# Altium PCB PCB1.PcbDoc
Units mil, origin at the board's own origin, x right, y up, seen from the top; angles counter-clockwise.
Board outline 1615 x 1995 mil, 4 copper layers (Top Layer, Layer 1, Layer 2, Bottom Layer), stack 23.756 mil thick; 24 components, 18 nets, 92 pads, 0 vias.
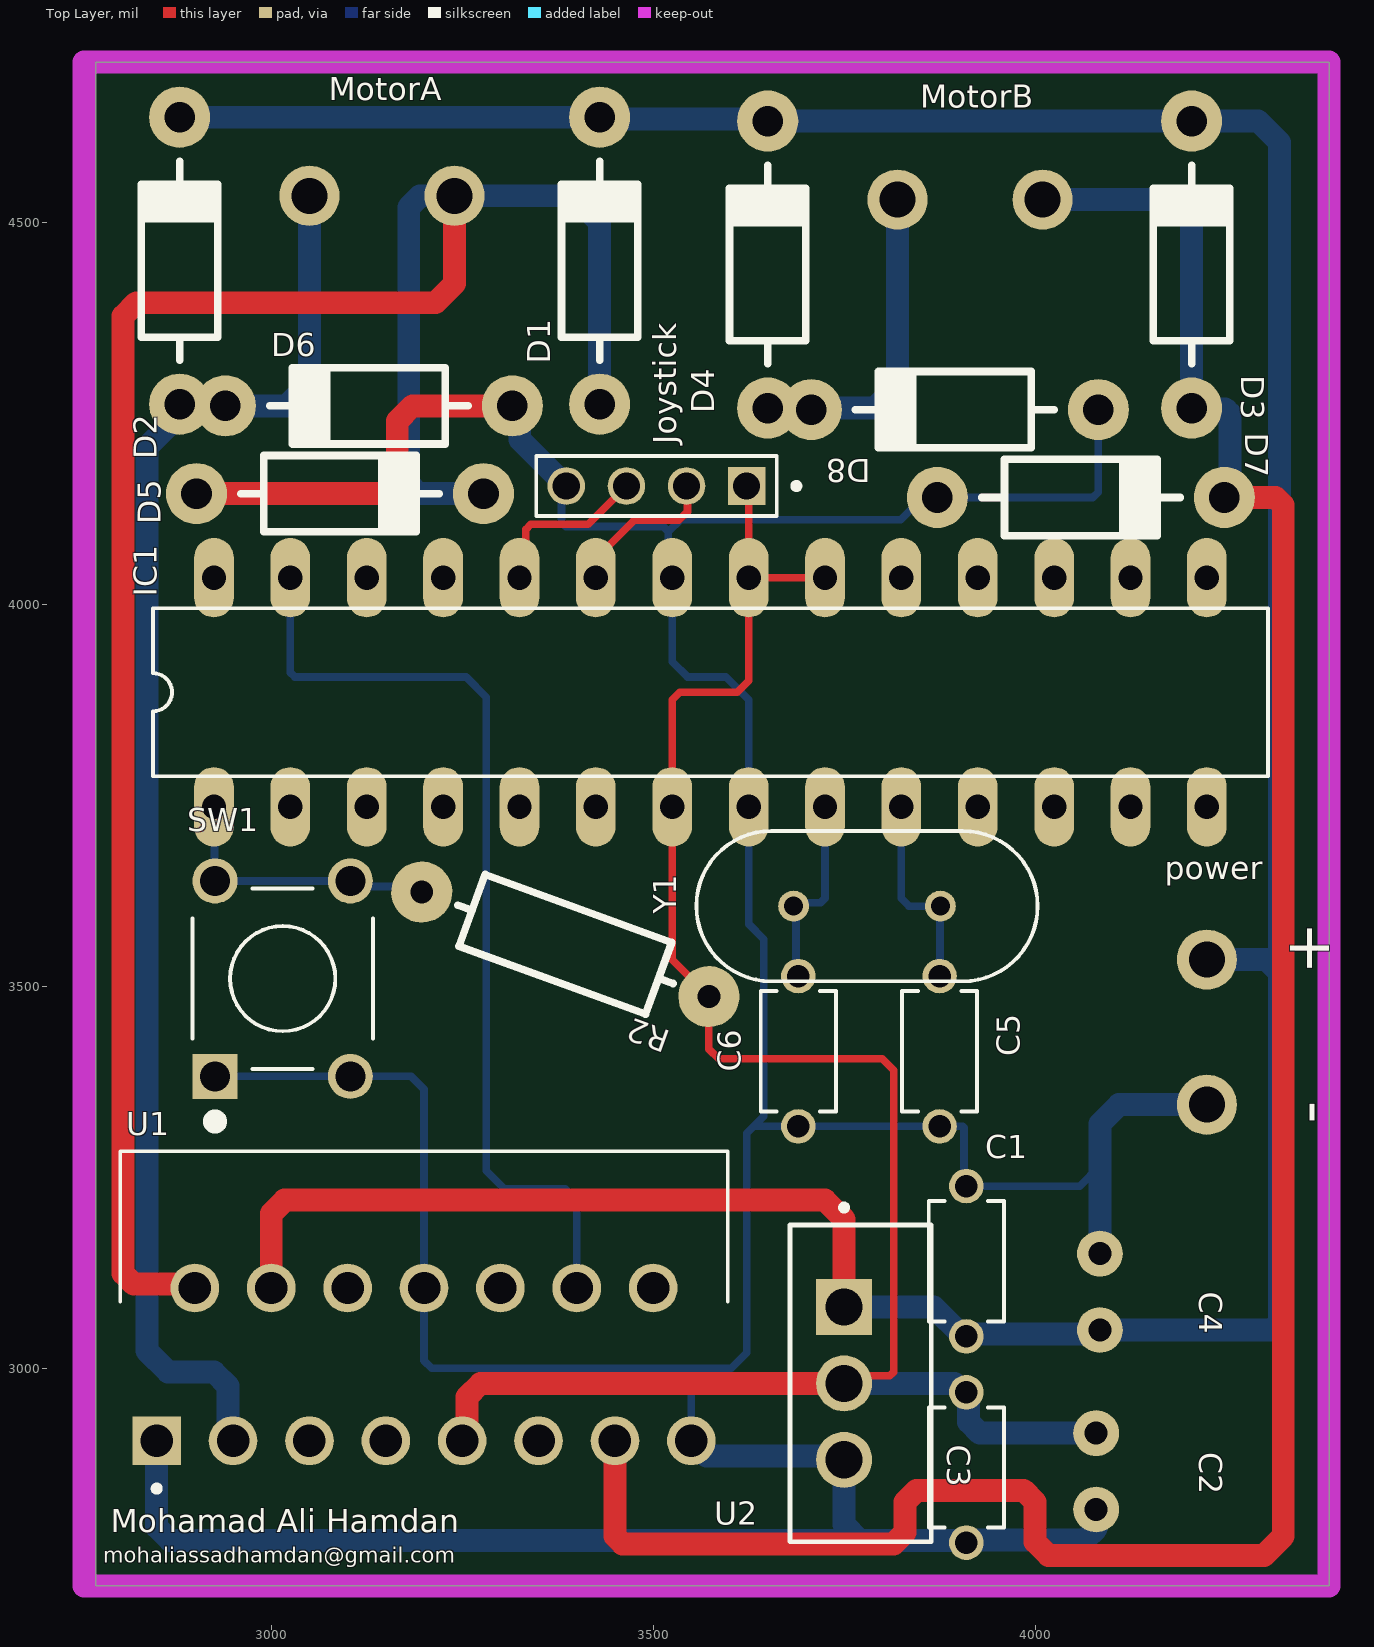
[diagram p0: Top Layer view]
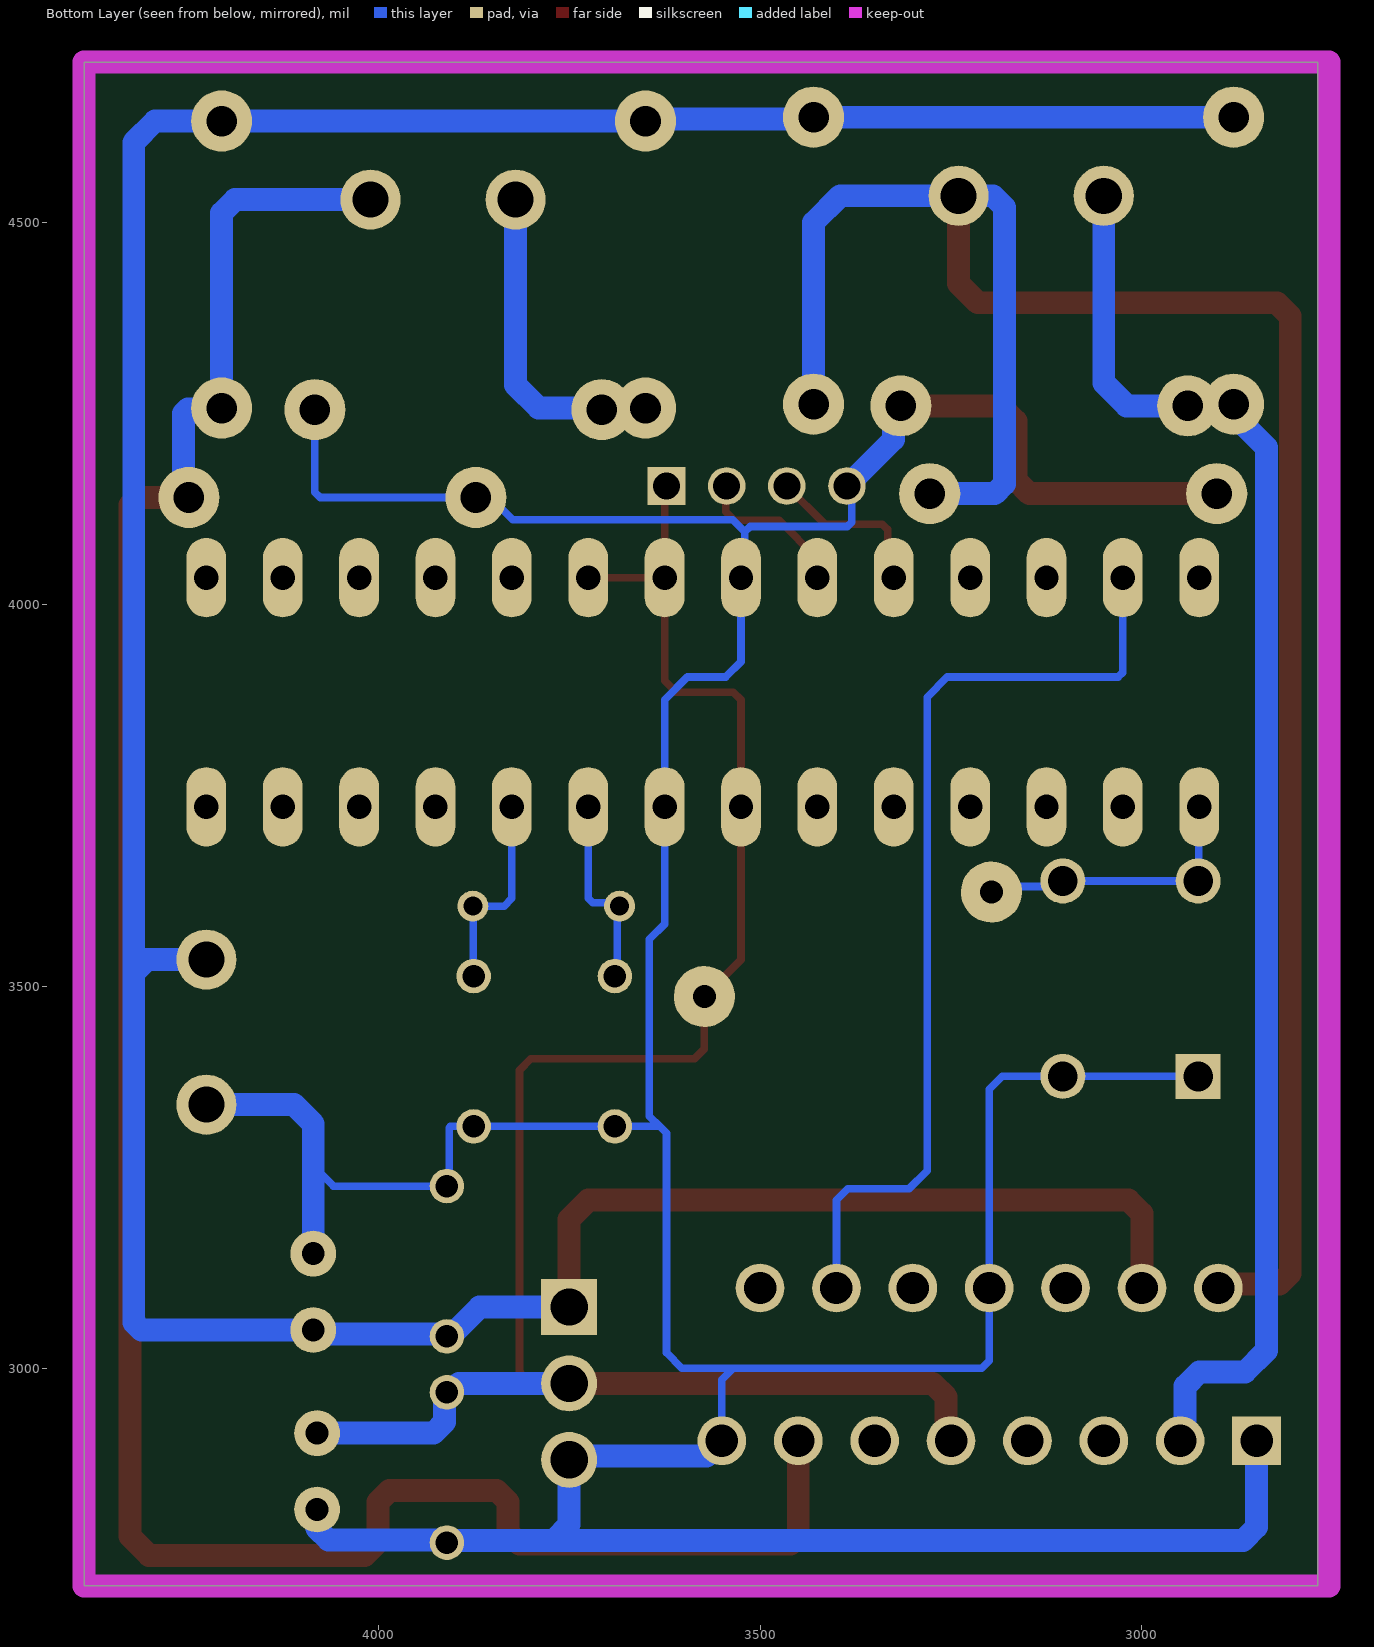
[diagram p1: Bottom Layer view, seen from below]
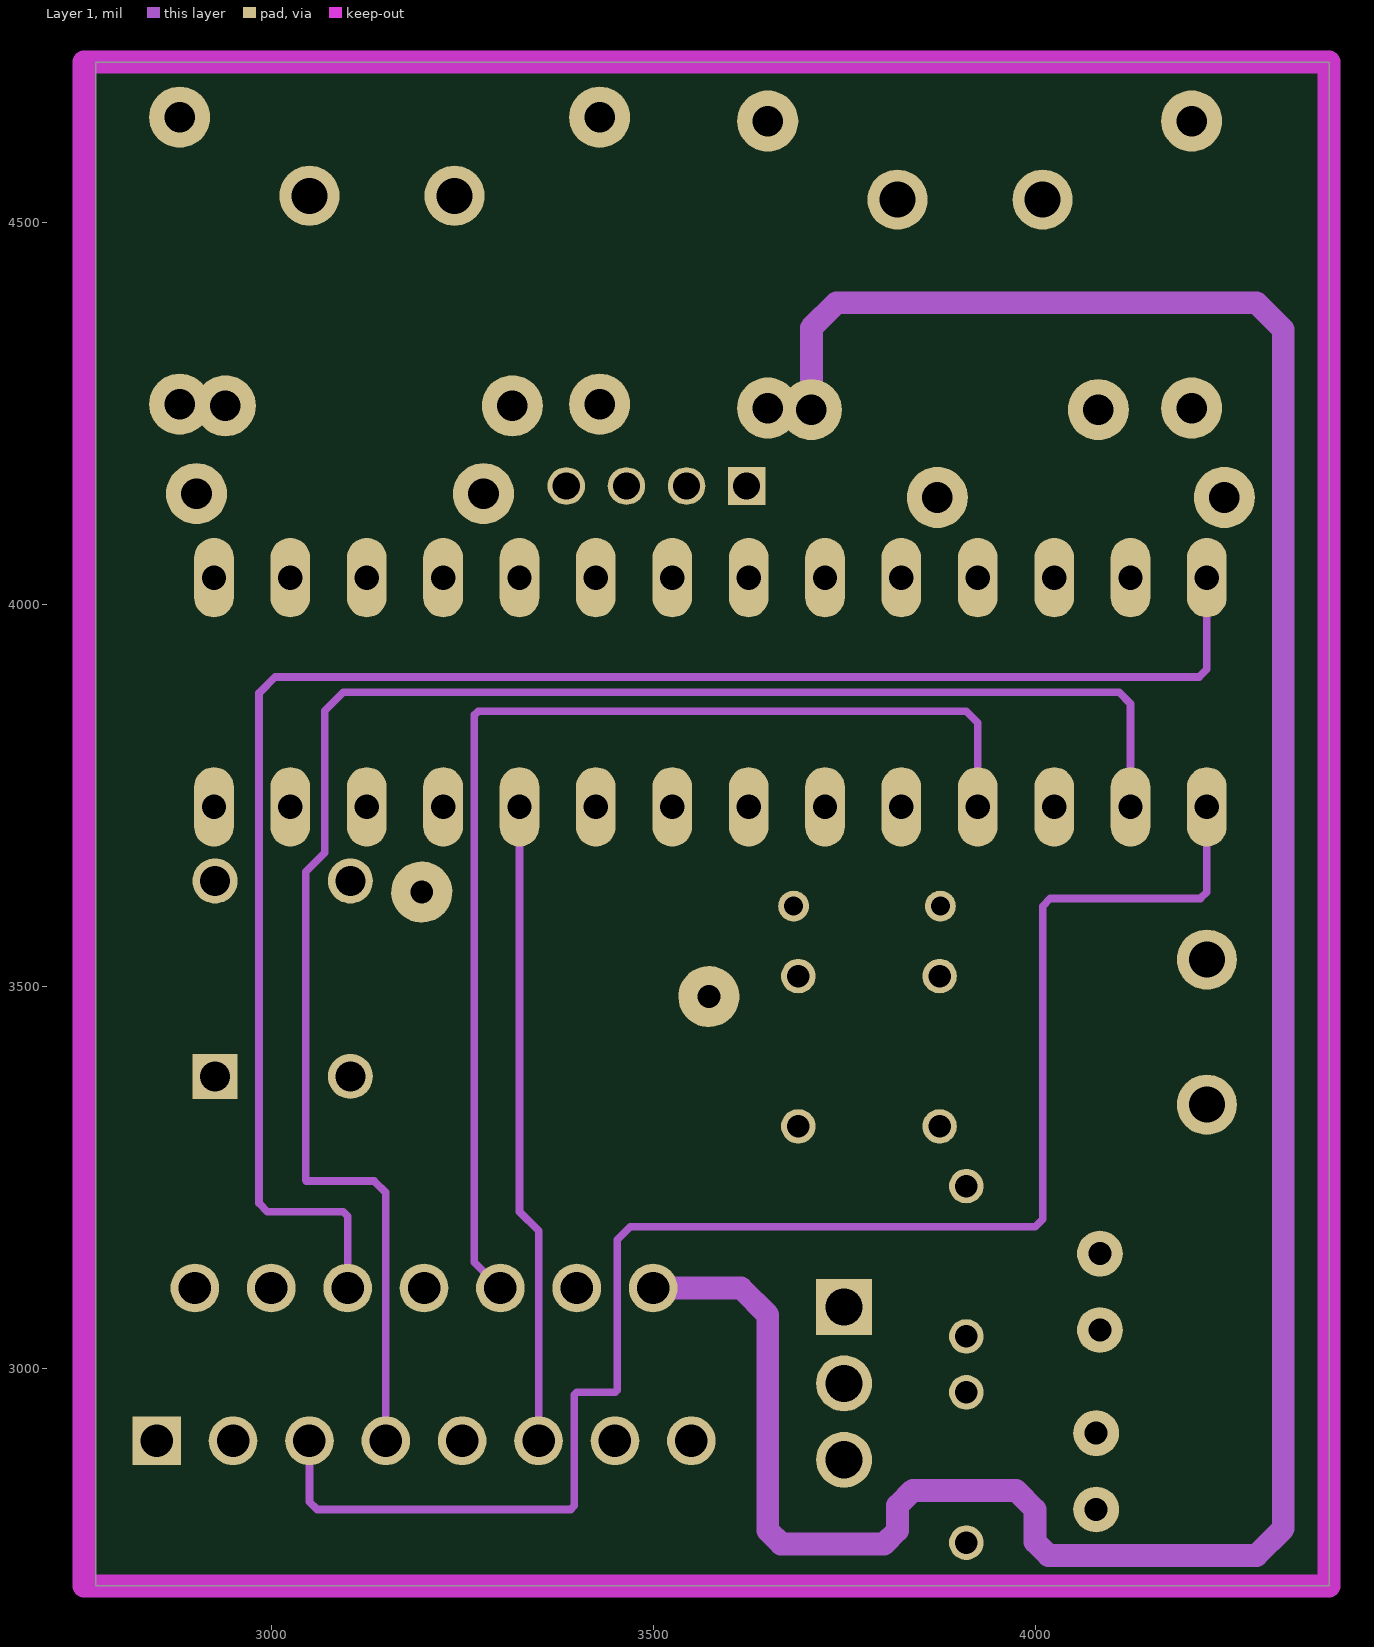
[diagram p2: Layer 1]
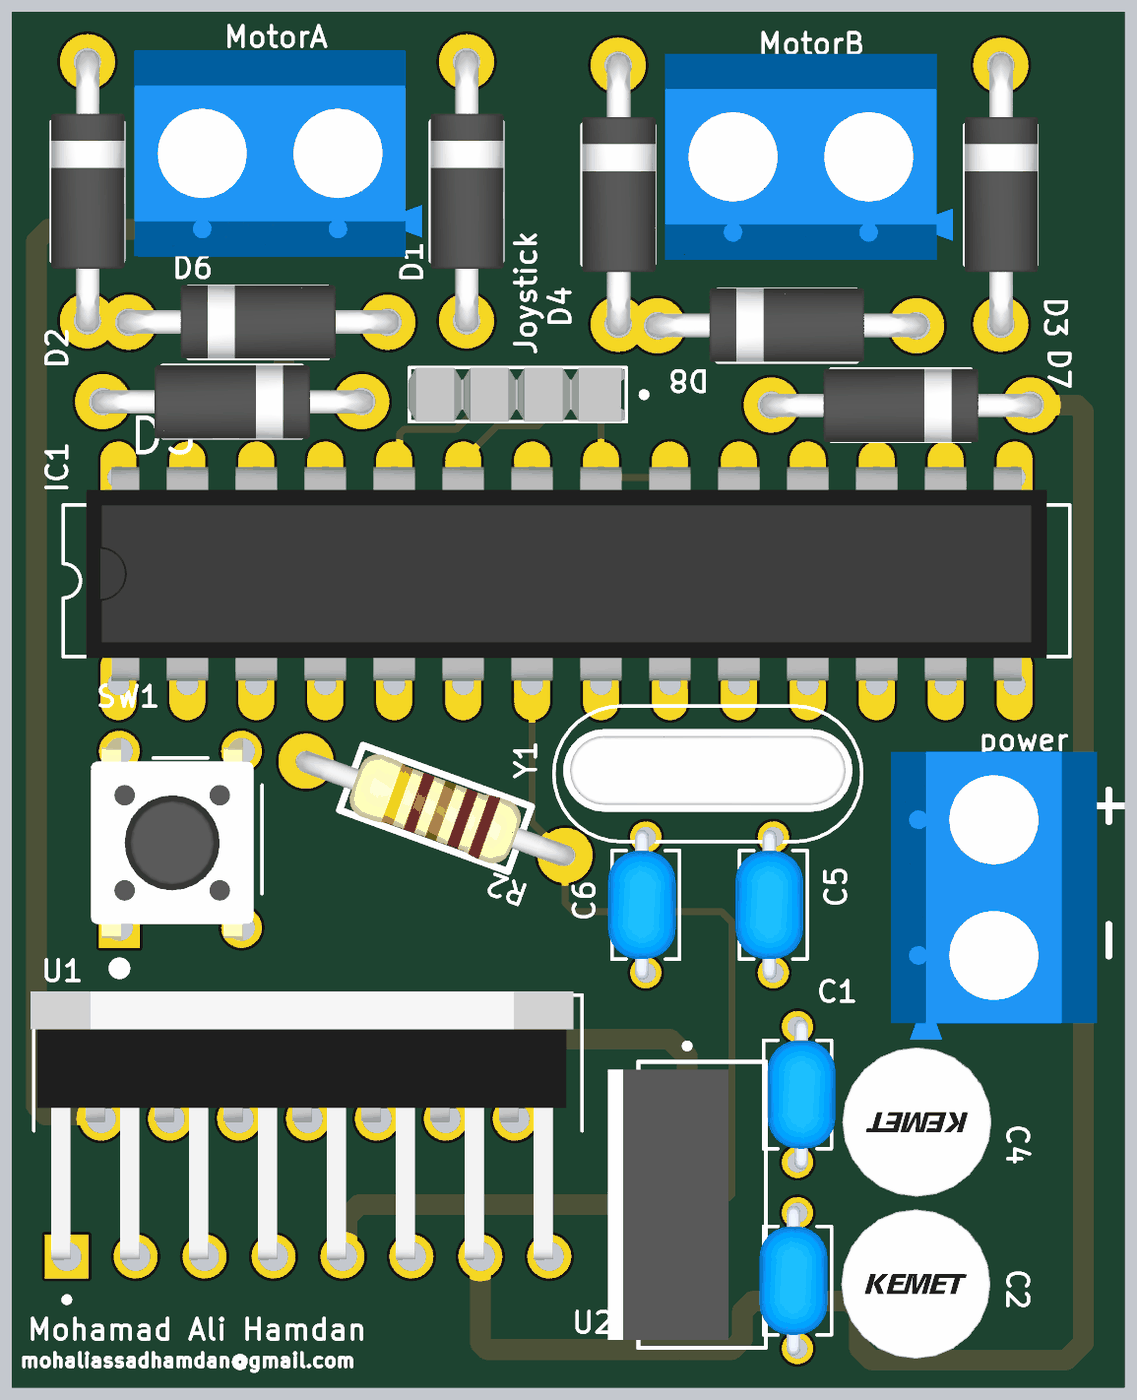
[diagram p3: 3D render of the assembled board from above, using the file's embedded part models]

## Layer stack, top to bottom
Top Solder: solder mask 0.4, Solder Resist, Dk 3.5
Top Layer: signal copper 1.4
Dielectric 1: prepreg 2.8, PP-006, Dk 4.1
Layer 1: signal copper 1.3779
Dielectric1: dielectric 12.6, FR-4, Dk 4.8
Layer 2: signal copper 1.3779
Dielectric 2: prepreg 2.8, PP-006, Dk 4.1
Bottom Layer: signal copper 1.4
Bottom Solder: solder mask 0.4, Solder Resist, Dk 3.5

## Board outline
2770,2715 2770,4710 4385,4710 4385,2715

## Design rules (kind name [scope] priority, off if disabled: settings)
Clearance [All] p1: gap=10 ignorepadtopadclearanceinfootprint=FALSE except(0: Arc-Hole Track-Hole SMDPad-Hole THPad-Hole Via-Hole Fill-Hole Poly-Hole Region-Hole Text-Hole)
FabricationTestPointUsage TestPointUsage [All] p1: valid=0 allowmultiple=FALSE
FabricationTestpoint Testpoint [All] p1: side=3 testpointundercomponent=TRUE minsize=40 maxsize=100 preferedsize=60 minholesize=0 maxholesize=40 preferedholesize=32 testpointgrid=1 allowsidetop=TRUE allowsidebottom=TRUE usegrid=TRUE gridtolerance=0.01
PolygonConnect [All] p1: connectstyle=Relief reliefconductorwidth=10 reliefentries=4 polygonreliefangle="90 Angle" airgapwidth=10
RoutingVias [All] p1: holewidth=28 width=50 viastyle="Through Hole" minholewidth=28 minwidth=50 maxholewidth=28 maxwidth=50
SilkToSolderMaskClearance SilkscreenOverComponentPads [IsPad] p1: minsilkscreentomaskgap=10 clearancetoexposedcopper=TRUE
SolderMaskExpansion [All] p1: expansion=4
Width [All] p1: maxlimit=40 minlimit=10 preferedwidth=30
27 further rules are at their usual default settings.

## Components (designator, comment, footprint, x,y, rotation, side; value= is the part's Value field where it differs from the comment)
C1 "Cap" CAP_RDER71H333K0M1H03A 3910,3140 r270 top value=100nF
C2 "Cap2" Capacitor_pol 4080,2915 r0 top value=100uF
C3 "Cap" CAP_RDER71H333K0M1H03A 3910,2870 r90 top value=100nF
C4 "Cap2" Capacitor_pol 4085,3050 r180 top value=100uF
C5 "14pF" CAP_RDER71H333K0M1H03A 3875,3415 r90 top
C6 "14pF" CAP_RDER71H333K0M1H03A 3690,3415 r90 top
D1 "Diode 1N914" "diode 4007" 3480,4350 r90 top
D2 "Diode 1N914" "diode 4007" 2930,4350 r90 top
D3 "Diode 1N914" "diode 4007" 4255,4345 r90 top
D4 "Diode 1N914" "diode 4007" 3700,4345 r90 top
D5 "Diode 1N914" "diode 4007" 2990,4095 r0 top
D6 "Diode 1N914" "diode 4007" 3227.87,4310 r180 top
D7 "Diode 1N914" "diode 4007" 3960,4090 r0 top
D8 "Diode 1N914" "diode 4007" 3995,4305 r180 top
IC1 "ATMEGA328-PU" DIL28 3575,3885 r90 top
Joystick "Header 4" TE_2355172-4 3622.48,4155 r180 top
MotorA "Header 2" blue_connector_2pins 3240,4535 r180 top
MotorB "Header 2" blue_connector_2pins 4010,4530 r180 top
power "Header 2" blue_connector_2pins 4225,3345 r90 top
R2 "Res1" resistor 3385,3555 r160 top value=10K
SW1 "FSM8JH" SW_FSM8JH 3015,3510 r90 top
U1 "L298N" TO127P2020X500X2100-15 2850,2905 r90 top
U2 "L7805CP" LM7805 3750,3080 r270 top
Y1 "16MHZ" XTAL_ECS-160-20-4VX 3780,3605 r180 top

## Footprints (in the part's own frame and the unit in brackets; to place one, negate y for a bottom-side part, rotate by r counter-clockwise, add the part's x,y. Pads: shape width x height; smd on the part's side, far side on the other; paste and mask are expansions set on the pad)
blue_connector_2pins [mm] "blue_connector_2pins"
  round 2 hole 1.2: 1(0,0) 2(4.826,0)
  body extent -3.19,-3.04 7.41,4.56, height 10
CAP_RDER71H333K0M1H03A [mm]
  round 1.15 hole 0.75: 1(-2.5,0) 2(2.5,0)
  silkscreen extent -2,-1.25 2,1.25, body extent -2.75,-1.1 3.68,4.32, height 7
Capacitor_pol [mil]
  round 60 hole 30: 1(0,0) 2(0,-100)
  body extent -107,-158 110,58, height 591
DIL28 [mil]
  oval 104x52 hole 32: 1(-150,650) 2(-150,550) 3(-150,450) 4(-150,350) 5(-150,250) 6(-150,150) 7(-150,50) 8(-150,-50) 9(-150,-150) 10(-150,-250) 11(-150,-350) 12(-150,-450) 13(-150,-550) 14(-150,-650) 15(150,-650) 16(150,-550) 17(150,-450) 18(150,-350) 19(150,-250) 20(150,-150) 21(150,-50) 22(150,50) 23(150,150) 24(150,250) 25(150,350) 26(150,450) 27(150,550) 28(150,650)
  silkscreen extent -110,-730 110,730, body extent -145,-697 165,697, height 205
"diode 4007" [mil]
  round 80 hole 40: 1(-87.87,50) 2(287.87,50)
  silkscreen extent -30,0 230,100, body extent -104,-4 305,102, height 111
LM7805 [mm] "LM7805"
  rect 1.86x1.86 hole 1.24: 1(0,0)
  round 1.86 hole 1.24: 2(2.54,0) 3(5.08,0)
  silkscreen extent -3.41,-1.8 7.81,2.9, body extent -2.44,-2.92 7.52,1.52, height 19.75
resistor [mil]
  round 80 hole 30: 1(200,0) 2(-200,0)
  silkscreen extent -150,-50 150,50, body extent -213,-46 213,48, height 91
SW_FSM8JH [mm]
  rect 1.498x1.498 hole 0.99: 1(-3.25,2.25)
  round 1.498 hole 0.99: 2(-3.25,-2.25) 3(3.25,2.25) 4(3.25,-2.25)
  silkscreen extent -4.95,-3 3,3, body extent -4.07,-2.69 3.82,3.3, height 9.5
TE_2355172-4 [mm]
  rect 1.25x1.25 hole 0.9: 1(0,0)
  round 1.25 hole 0.9: 2(2,0) 3(4,0) 4(6,0)
  silkscreen extent -1.75,-1 7,1, body extent -0.95,-1 7.05,1, height 6
TO127P2020X500X2100-15 [mm]
  rect 1.62x1.62 hole 1.08: 1(0,0)
  round 1.62 hole 1.08: 2(5.08,-1.27) 3(0,-2.54) 4(5.08,-3.81) 5(0,-5.08) 6(5.08,-6.35) 7(0,-7.62) 8(5.08,-8.89) 9(0,-10.16) 10(5.08,-11.43) 11(0,-12.7) 12(5.08,-13.97) 13(0,-15.24) 14(5.08,-16.51) 15(0,-17.78)
  silkscreen extent -1.69,-18.99 9.63,1.21, body extent -0.12,-18.67 9.77,1.33, height 20.5
XTAL_ECS-160-20-4VX [mm]
  round 1.03 hole 0.63: 1(-2.44,0) 2(2.44,0)
  silkscreen extent -5.68,-2.5 5.68,2.5, body extent -5.33,-1.65 5.33,1.4, height 4.09

## Part data
C1 C2 C3 C4: "Capacitor", Publisher="Altium Limited"
  C1 C3: LatestRevisionDate=17-Jul-2002, LatestRevisionNote="Re-released for DXP Platform.", PackageReference=RAD-0.3, Published=8-Jun-2000
  C2 C4: PackageReference=CAPR5-4X5, Published=23-Sep-2002
C5 C6: library part RDER71H333K0M1H03A, "Lead capacitor X7R(EIA) with Capacitance 33000pF, Rated Voltage 50Vdc", Package="Radial Murata", Availability=Warning, BuyPart=22PF, MF=Murata, Mouser-Purchase-URL=https://snapeda.com/shop?store=Mouser&id=4546735, MP=RDER71H333K0M1H03A, Price=None, SnapEDA_Link=https://www.snapeda.com/parts/RDER71H333K0M1H03A/Murata/view-part/4546735/?ref=snap
D1 D2 D3 D4 D5 D6 D7 D8: "High Conductance Fast Diode", Code_JEDEC=DO-204-AH, ComponentLink1Description="Manufacturer Link", ComponentLink1URL=http://www.fairchildsemi.com/, ComponentLink2Description=Datasheet, ComponentLink2URL=http://www.fairchildsemi.com/ds/1N%2F1N4448.pdf, DatasheetDocument=1997, LatestRevisionDate=17-Jul-2002, LatestRevisionNote="Re-released for DXP Platform.", PackageReference=DO-35, Published=8-Jun-2000, Publisher="Altium Limited"
IC1: "AVR AVR® ATmega Microcontroller IC 8-Bit 20MHz 32KB _16K x 16_ FLASH 28-PDIP", Package="DIP-28 Microchip Technology", Availability=Unavailable, MF="Microchip Technology", MP=ATMEGA328-PU, Price=None, SnapEDA_Link=https://www.snapeda.com/parts/ATMEGA328-PU/Microchip/view-part/4327846/?ref=snap
Joystick: "Header, 4-Pin", LatestRevisionDate=17-Jul-2002, LatestRevisionNote="Re-released for DXP Platform.", Publisher="Altium Limited"
MotorA MotorB power: "Header, 2-Pin", LatestRevisionDate=17-Jul-2002, LatestRevisionNote="Re-released for DXP Platform.", Publisher="Altium Limited"
R2: "Resistor", LatestRevisionDate=17-Jul-2002, LatestRevisionNote="Re-released for DXP Platform.", PackageDescription="Axial Device, Thru-Hole; 2 Leads; 0.3 in Pin Spacing", PackageReference=AXIAL-0.3, Published=8-Jun-2000, Publisher="Altium Limited"
SW1: "Tactile Switch SPST-NO Top Actuated Through Hole", Package=None, Availability=Unavailable, MF="TE Connectivity", MP=FSM8JH, Price=None, SnapEDA_Link=https://www.snapeda.com/parts/FSM8JH/TE%20Connectivity%20ALCOSWITCH%20Switches/view-part/139741/?ref=snap, TE_purchase_URL=https://www.te.com/usa-en/product-FSM8JH.html?te_bu=Cor&te_type=disp&te_campaign=seda_glo_cor-seda-global-disp-prtnr-fy19-seda-model-bom-cta_sma-317_1&elqCampaignId=32493
U1: "Dual Full Bridge Driver", ComponentLink1Description="Manufacturer Link", ComponentLink1URL=http://www.st.com/, ComponentLink2Description=Datasheet, ComponentLink2URL=http://www.st.com/stonline/products/literature/ds/1773/l298.pdf, DatasheetVersion=Jul-1999, LatestRevisionDate=14-May-2007, LatestRevisionNote="Mapped to vertical PCB.", PackageDescription="TO, Thru-Hole, Vertical, Heatsink Mounted; 15 Bent Staggered Leads; Pitch 1.27 mm", PackageReference=Multiwatt15V, Published=8-Jun-2000, Publisher="Altium Limited"
U2: "Positive Voltage Regulator", ComponentLink1Description="Manufacturer Link", ComponentLink1URL=http://www.st.com/, DatasheetVersion=Dec-1998, LatestRevisionDate=17-Jul-2002, LatestRevisionNote="Re-released for DXP Platform.", Note="Tab is connected to pin 3 (GND).", PackageDescription="TO, Thru-Hole, Vertical, Heatsink Mounted; 3 In-Line Leads; Pitch 2.54 mm; Pin sequence 1, 3, 2", PackageReference=ISOWATT220AB, PackageVersion=Jul-1998, Published=24-Aug-2001, Publisher="Altium Limited"
Y1: library part ECS-160-20-4VX, "16MHz ±30ppm Crystal 20pF 50 Ohms HC-49/US", Package="HC49/US ECS International", Availability=Unavailable, MF="ECS Inc.", MP=ECS-160-20-4VX, Price=None, SnapEDA_Link=https://www.snapeda.com/parts/ECS-160-20-4VX/ECS%20Inc./view-part/47293/?ref=snap

## Nets (pads, with @x,y where several pads share a name; then routed paths per layer and width w, separated by ;. In a path a pad name is that pad's centre, name@x,y a point inside that pad or via, vN(x,y) a via of type N, cw(c..) or ccw(c..) an arc to the next point about the centre after c; other vN are vias at no path point)
+5V: C2.1 C3.2 IC1.7 IC1.20 IC1.21 Joystick.1 R2.2 U1.9 U2.2 | length 2581.5
  Top Layer w10: Joystick.1 3625,4152.48 IC1.21 ; IC1.20 IC1.21 ; U2.2 3760.04,2990.04 3810,2990.04 3815,2995.04 3815,3390 3800,3405 3585.88,3405 3572.94,3417.94 R2.2 3525,3534.53 IC1.7 3525,3875 3535,3885 3610,3885 3625,3900 IC1.21
  Top Layer w30: U1.9 3256.46,2911.46 3256.46,2962.43 3274.04,2980 U2.2
  Bottom Layer w30: U2.2 C3.2@3894.29,2980 ; C3.2 3912.92,2965.5 3912.92,2929.65 3927.57,2915 C2.1
ENA: IC1.15 U1.6 | length 2259
  Layer 1 w10: U1.6 3100,3199.14 3094.14,3205 2995,3205 2984,3216 2984,3884 3005,3905 4215,3905 4225,3915 IC1.15
ENB: IC1.5 U1.11 | length 840.4
  Layer 1 w10: IC1.5 3325,3205 3350,3180 U1.11
GND: C1.1 C2.2 C3.1 C4.2 C5.1 C6.1 D5.1 D6.1 D7.1 D8.1 IC1.8 IC1.22 Joystick.4 power.1 SW1.1 SW1.2 U1.1 U1.8 U1.15 U2.3 | length 6415.7
  Top Layer w30: D5.1 3147.43,4145 3165,4162.57 3165,4240 3185,4260 D6.1
  Bottom Layer w10: SW1.1 SW1.2 3182.95,3382.05 3200,3365 U1.8 3200,3010 3210,3000 3535,3000 ; Joystick.4 3380,4148.74 3380,4107.86 3385.86,4102 3513,4102 3520,4095 ; U1.15 3550,2985 3535,3000 ; C5.1 C6.1 3631.57,3316.57 ; C5.1@3893.43,3316.57 3905.5,3316.57 3907.08,3315 C1.1@3907.08,3241.35 ; C1.1 4058.43,3238.43 4085,3265 ; D8.1 4082.87,4147.13 4075.75,4140 D7.1 3853.18,4140 3823.99,4110.8 3535.8,4110.8 3520,4095 ; 3520,4095 3520,4040 IC1.22 3525,3925 3545,3905 3595,3905 3625,3875 IC1.8 3625,3581.57 3645,3561.57 3645,3330 3631.57,3316.57 ; 3535,3000 3602.48,3000 3622.48,3020 3622.48,3307.48 3631.57,3316.57
  Bottom Layer w30: U1.1 2850,2792.07 2867.57,2774.5 3770.5,2774.5 ; D6.1 3325.32,4250.43 3325.32,4215.94 Joystick.4 ; U1.15 3570,2885 3733.3,2885 3738.3,2880 U2.3 3750,2795 3770.5,2774.5 ; C1.1@3907.08,3241.35 C1.1 ; C2.2 4080,2790 4065,2775 3917.56,2775 3914.13,2771.57 C3.1 3907.08,2774.5 3770.5,2774.5 ; C4.2 4085,3265 4085,3320 4110,3345 power.1
Horz: IC1.24 Joystick.3 | length 221.9
  Top Layer w10: IC1.24 3333.04,4043.04 3333.04,4098.04 3340,4105 3415,4105 Joystick.3
IN1: IC1.14 U1.5 | length 2146
  Layer 1 w10: U1.5 3050,2825 3060,2815 3391.89,2815 3396.89,2820 3396.89,2965.32 3400,2968.43 3450,2968.43 3453.11,2971.54 3453.11,3168.11 3470,3185 4000,3185 4010,3195 4010,3605 4020,3615 4216.6,3615 4225,3623.4 IC1.14
IN2: IC1.13 U1.7 | length 2268.1
  Layer 1 w10: U1.7 3150,3230 3135,3245 3045.86,3245 3045,3245.86 3045,3650 3070,3675 3070,3860.86 3094.14,3885 4110,3885 4125,3870 IC1.13
IN3: IC1.11 U1.10 | length 1541.5
  Layer 1 w10: U1.10 3266,3139 3266,3855.14 3270.86,3860 3910,3860 3925,3845 IC1.11
IN4: IC1.27 U1.12 | length 1263.5
  Bottom Layer w10: IC1.27 3025,3910.86 3030.86,3905 3255,3905 3281.35,3878.65 3281.35,3258.65 3305,3235 3385,3235 3400,3220 U1.12
NetC5_2: C5.2 IC1.10 Y1.1 | length 267.2
  Bottom Layer w10: IC1.10 3825,3615.07 3835.07,3605 Y1.1 3875.53,3604.47 3875.53,3513.96 C5.2
NetC6_2: C6.2 IC1.9 Y1.2 | length 259.3
  Bottom Layer w10: C6.2 3686.97,3516.46 3686.97,3601.97 Y1.2 3688.15,3609.21 3719.14,3609.21 3725,3615.07 IC1.9
NetIC1_1: IC1.1 R2.1 SW1.3 SW1.4 | length 374.3
  Bottom Layer w10: IC1.1 2925.71,3734.29 2925.71,3638.66 SW1.3 SW1.4 3110.86,3630.68 3189.79,3630.68 R2.1
OUT1: D1.1 D5.2 MotorA.1 U1.2 | length 2896.1
  Top Layer w30: U1.2 2895,3110 2820,3110 2805.81,3124.19 2805.81,4377.43 2823.39,4395 3215,4395 3240,4420 MotorA.1
  Bottom Layer w30: D5.2 3192.87,4145 3180,4157.87 3180,4520 3195,4535 MotorA.1 3395,4535 3430,4500 D1.1
OUT2: D2.1 D6.2 MotorA.2 U1.3 | length 1885.1
  Bottom Layer w30: U1.3 2943.54,2911.46 2943.54,2976.46 2925,2995 2865,2995 2837.13,3022.87 2837.13,4205.72 2877.87,4246.47 2877.87,4260 D2.1 2881.06,4261.06 2938.94,4261.06 D6.2 3020,4260 3050,4290 MotorA.2
OUT3: D3.1 D7.2 MotorB.1 U1.13 | length 3187.6
  Top Layer w30: U1.13 3450,2780 3460,2770 3815,2770 3830,2785 3830,2825 3845,2840 3985,2840 4000,2825 4000,2772.57 4017.57,2755 4300,2755 4325,2780 4325,4130 4315,4140 D7.2
  Bottom Layer w30: MotorB.1 4187.43,4530 4205,4512.43 D3.1 4206.06,4256.06 4248.94,4256.06 4255,4250 4255,4147.13 D7.2
OUT4: D4.1 D8.2 MotorB.2 U1.14 | length 4059.9
  Layer 1 w30: U1.14 3615,3105 3650,3070 3650,2787.57 3667.57,2770 3802.43,2770 3820,2787.57 3820,2820 3840,2840 3975,2840 4000,2815 4000,2772.57 4017.57,2755 4290,2755 4325,2790 4325,4360 4290,4395 3740,4395 3707.13,4362.13 D8.2 3706.06,4256.06 3651.06,4256.06 D4.1
  Bottom Layer w30: D4.1 3651.06,4256.06 3706.06,4256.06 D8.2 3709.25,4257.13 3790,4257.13 3820,4287.13 MotorB.2
VCC: C1.2 C4.1 D1.2 D2.2 D3.2 D4.2 power.2 U1.4 U2.1 | length 4674.5
  Top Layer w30: U1.4 3000,3202.43 3017.57,3220 3725,3220 3750,3195 U2.1
  Bottom Layer w30: D2.2 D1.2 3432.5,4635.37 3647.5,4635.37 D4.2 D3.2 4292.13,4632.87 4320,4605 4320,3517.43 ; U2.1 3867.44,3080 3905.87,3041.57 C1.2 3912.92,3044.5 4079.5,3044.5 C4.1 4310,3050 4320,3060 4320,3517.43 ; power.2 4302.43,3535 4320,3517.43
Vert: IC1.23 Joystick.2 | length 204.6
  Top Layer w10: IC1.23 3425,4060 3475,4110 3533.74,4110 3545,4121.26 3545,4153.74 Joystick.2
pads on no net: IC1.2 IC1.3 IC1.4 IC1.6 IC1.12 IC1.16 IC1.17 IC1.18 IC1.19 IC1.25 IC1.26 IC1.28

## Keep-outs
Keep-Out Layer:
  lines w30: 2755,2715 2755,4710 4385,4710 4385,2715 2755,2715

## Silkscreen, mask and mechanical layers (free items; w line width, h text height)
Top Overlay:
  text "+" at 4385,3515 h60 r90
  text "-" at 4385,3320 h60 r90
  text "Mohamad Ali Hamdan" at 2790,2785 h30
  text "mohaliassadhamdan@gmail.com" at 2780,2745 h20